# EAGLE board brick_i2c_proximity_mini (EAGLE 7.4.0)
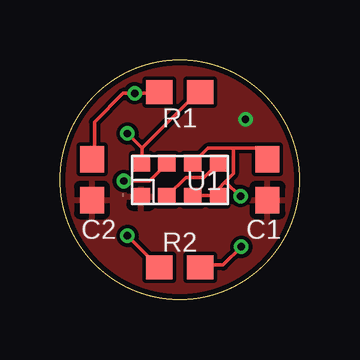
[diagram p0: board, top side]
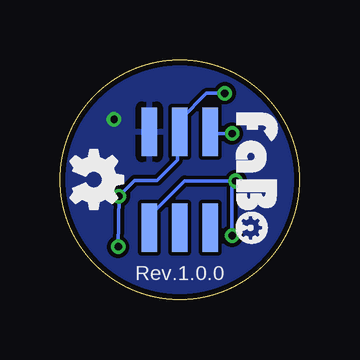
[diagram p1: board, bottom side, seen from below]

Size 10 x 10 mm. Coordinates in mm from the lower left corner, seen from the top.
Copper layers (1*16): Top 0.035mm / dielectric 1.5mm / Bottom 0.035mm
Design rules "Elecrow_2-layer_eagle_rule": minimum track width 6mil, minimum drill 12mil, track to track 6mil, track to pad 6mil, pad to pad 6mil, via to via 6mil, smd to smd 0mil, copper to edge 10mil, drill to drill 10mil, minimum pad ring 10mil, minimum via ring 6mil, stop-mask expansion 2mil, vias tented up to drill 100mil, thermal gap 10mil

## Footprints (pad centres in the part's own frame; a part is rotated, then mirrored left to right if it is on the bottom)
EIA0603 = smd 1.1 x 1: 1 -0.85,0; 2 0.85,0
VCNL4040M3OE = smd 0.7 x 0.725: 1 0.7,-1.613; 2 0.7,-0.537; 3 0.7,0.537; 4 0.7,1.613; 5 -0.7,1.613; 6 -0.7,0.537; 7 -0.7,-0.537; 8 -0.7,-1.613
FABO-NANO = smd 0.635 x 2.032 bottom: 0 -1.27,2; 1 1.27,-2; 2 0,-2; 3 -1.27,-2; GND 1.27,2; VCC 0,2

## Placement (x,y rotation side)
C1  0.1uF  [EIA0603]  8.66,5 270 top
C2  0.1uF  [EIA0603]  1.34,5 270 top
R1  4.7k  [EIA0603]  5,8.66 180 top
R2  4.7k  [EIA0603]  5,1.34 0 top
U1  [VCNL4040M3OE]  5,5 270 top
U$2  FABO-NANO  [FABO-NANO]  5,5 0 top
U$3  [LOGO_OSHW_S_BOTTOM]  8.58,5 90 top
U$4  [LOGO_FABO_S_BOTTOM]  2.66,5 90 top

## Library data of the parts
C1 C2 R1 R2 U$3 U$4 = FaBo-etc
U1 = FaBo-Sensor
U$2 = FaBo-Template

## Nets
3V3: C1.1 C2.1 R1.2 R2.2 U1.3 U1.4 U1.6 U$2.VCC
GND: C1.2 C2.2 U1.1 U$2.GND
N$1: U1.2 U1.5
SCL: R1.1 U1.8 U$2.0
SDA: R2.1 U1.7 U$2.1

## Tracks (layer width: path | path; a pad name or v marks a point on that pad's centre or on a via)
3V3  (via drill 0.3)
  Top 0.152: C2.1 1.44,5.86 1.44,7.41 2.64,8.61 v3.12,8.61 4.04,8.61 R1.2 | U1.3 5.56,4.34 6.47,4.34 U1.4 6.63,4.34 6.63,4.64 6.88,4.9 | 7.24,6.32 8.15,6.32 8.61,5.86 C1.1 | 7.24,6.32 6.17,6.32 5.56,5.71 U1.6 | 6.88,4.9 7.24,5.25 7.24,6.32 | v7.56,2.21 6.8,1.44 5.86,1.44 R2.2 | v7.54,4.31 6.88,4.9
  Bottom 0.152: v7.56,2.21 v7.54,4.31 6.88,4.97 5.94,4.97 5.1,5.81 5.1,6.93 U$2.VCC 4.95,7.08 4.95,7.54 3.88,8.61 v3.12,8.61
GND  (via drill 0.3)
  other vias: 7.74,7.51
  pour Bottom: -1.35,-1.35 11.35,-1.35 11.35,11.35 -1.35,11.35
  pour Top: -1.35,-1.35 11.35,-1.35 11.35,11.35 -1.35,11.35
N$1
  Top 0.152: U1.2 4.49,4.34 5.25,5.1 6.02,5.1 6.47,5.56 U1.5
SCL  (via drill 0.3)
  Top 0.152: 3.42,6.32 3.42,5.71 U1.8 | 3.42,6.32 5.71,8.61 R1.1 | 3.42,6.32 v2.82,6.93
  Bottom 0.152: v2.82,6.93 3.73,6.93 U$2.0
SDA  (via drill 0.3)
  Top 0.152: v2.66,4.95 3.73,4.95 4.34,5.56 U1.7 | v2.82,2.66 4.04,1.44 R2.1
  Bottom 0.152: 2.82,4.95 4.8,4.95 6.17,3.58 6.17,3.12 U$2.1 | 2.82,4.95 v2.82,2.66 | 2.82,4.95 v2.66,4.95

## Text on the board
bPlace: Rev.1.0.0